# Altium PCB PCB1.PcbDoc
Units mm, origin at the board's own origin, x right, y up, seen from the top; angles counter-clockwise.
Board outline 99.19 x 94.49 mm, 2 copper layers (Top Layer, Bottom Layer); 46 components, 45 nets, 177 pads, 18 vias.
Unrouted connection lines stored in the file: 1.
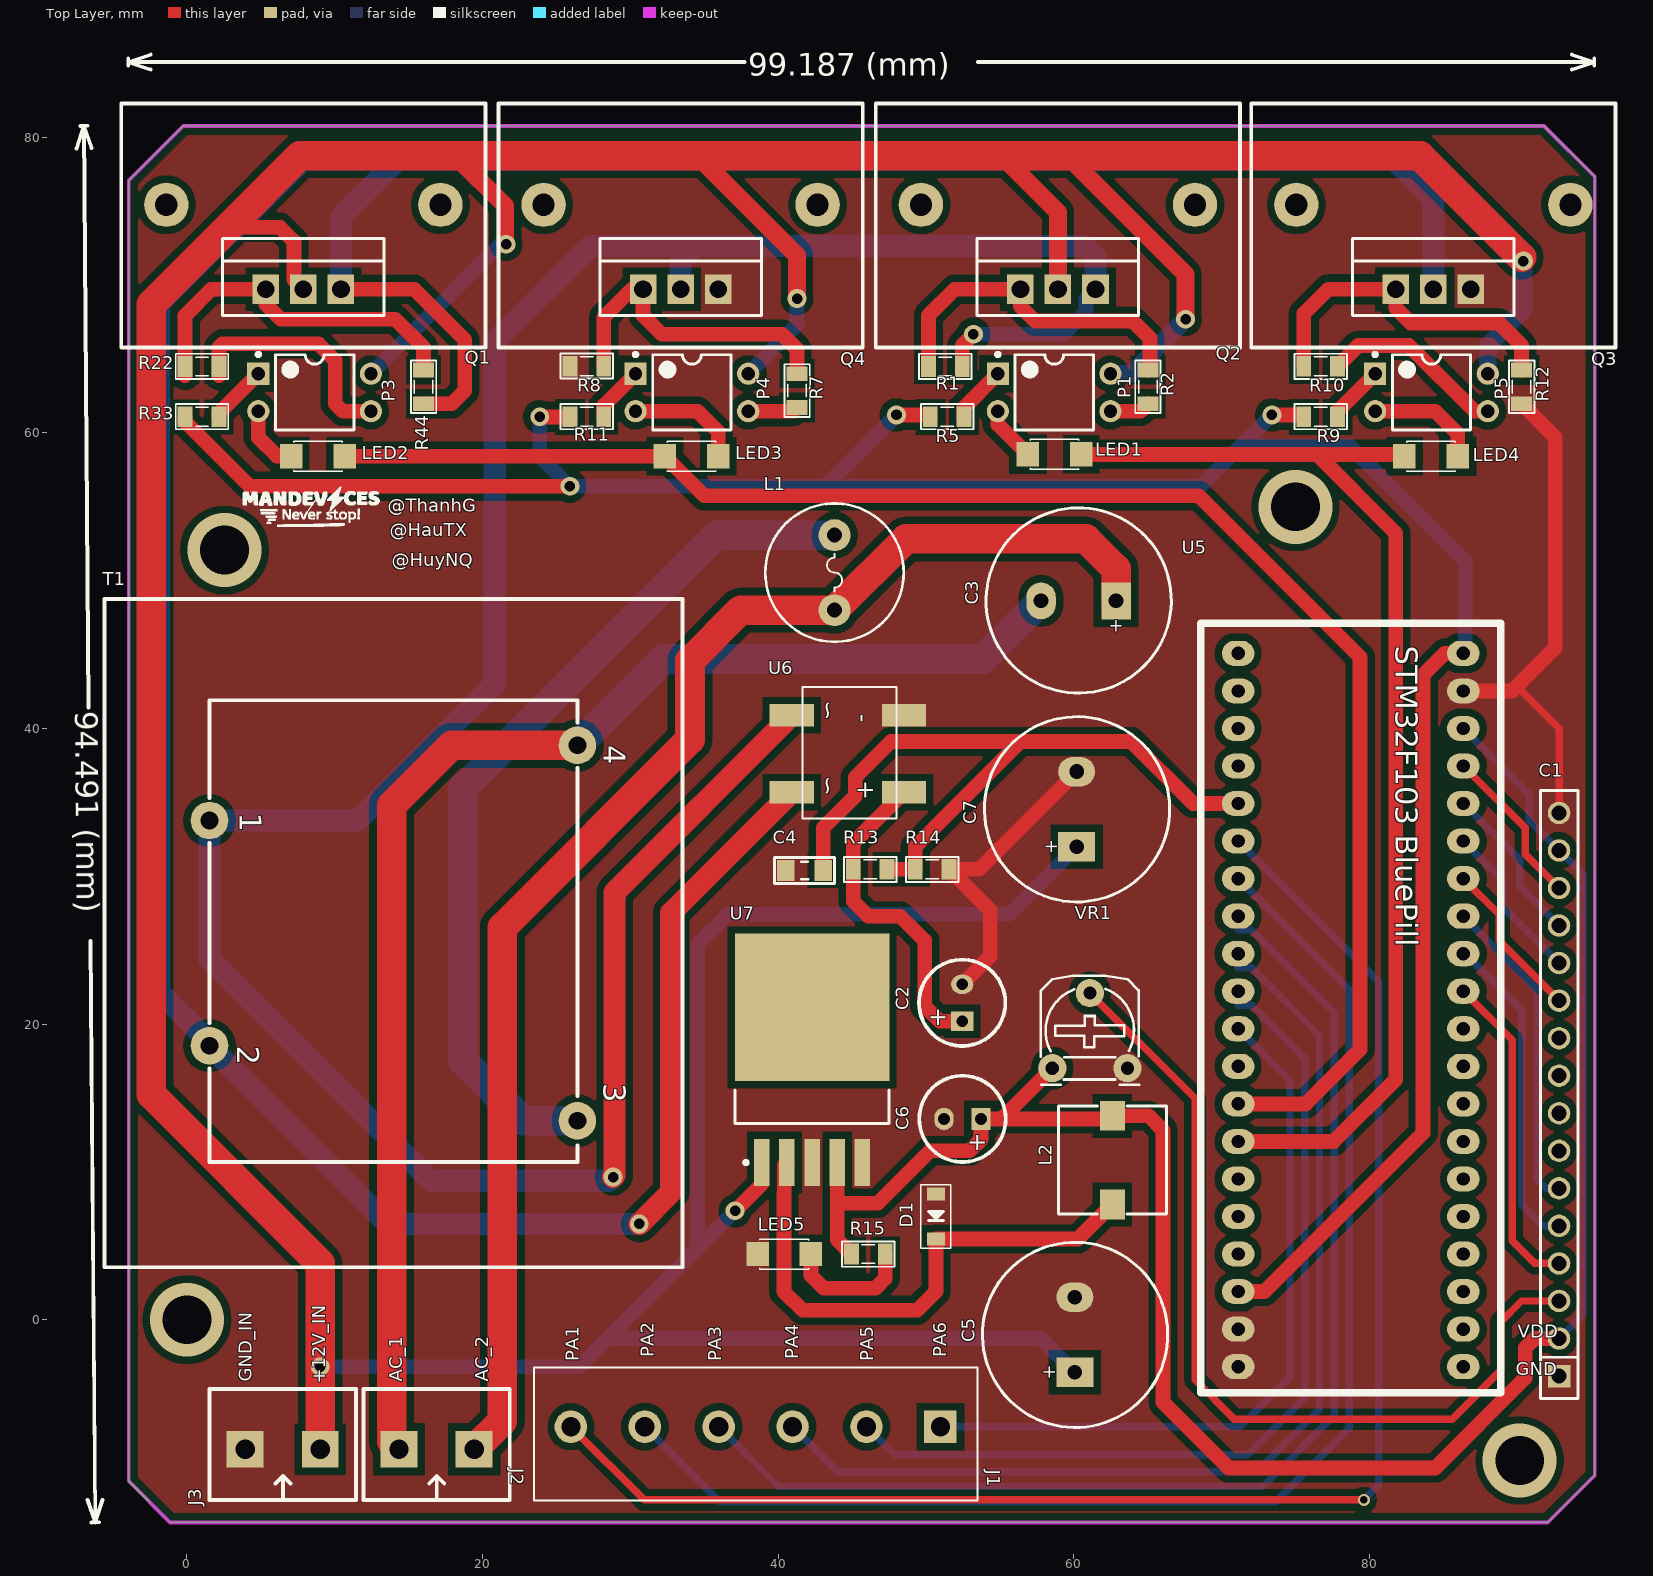
[diagram p0: Top Layer view]
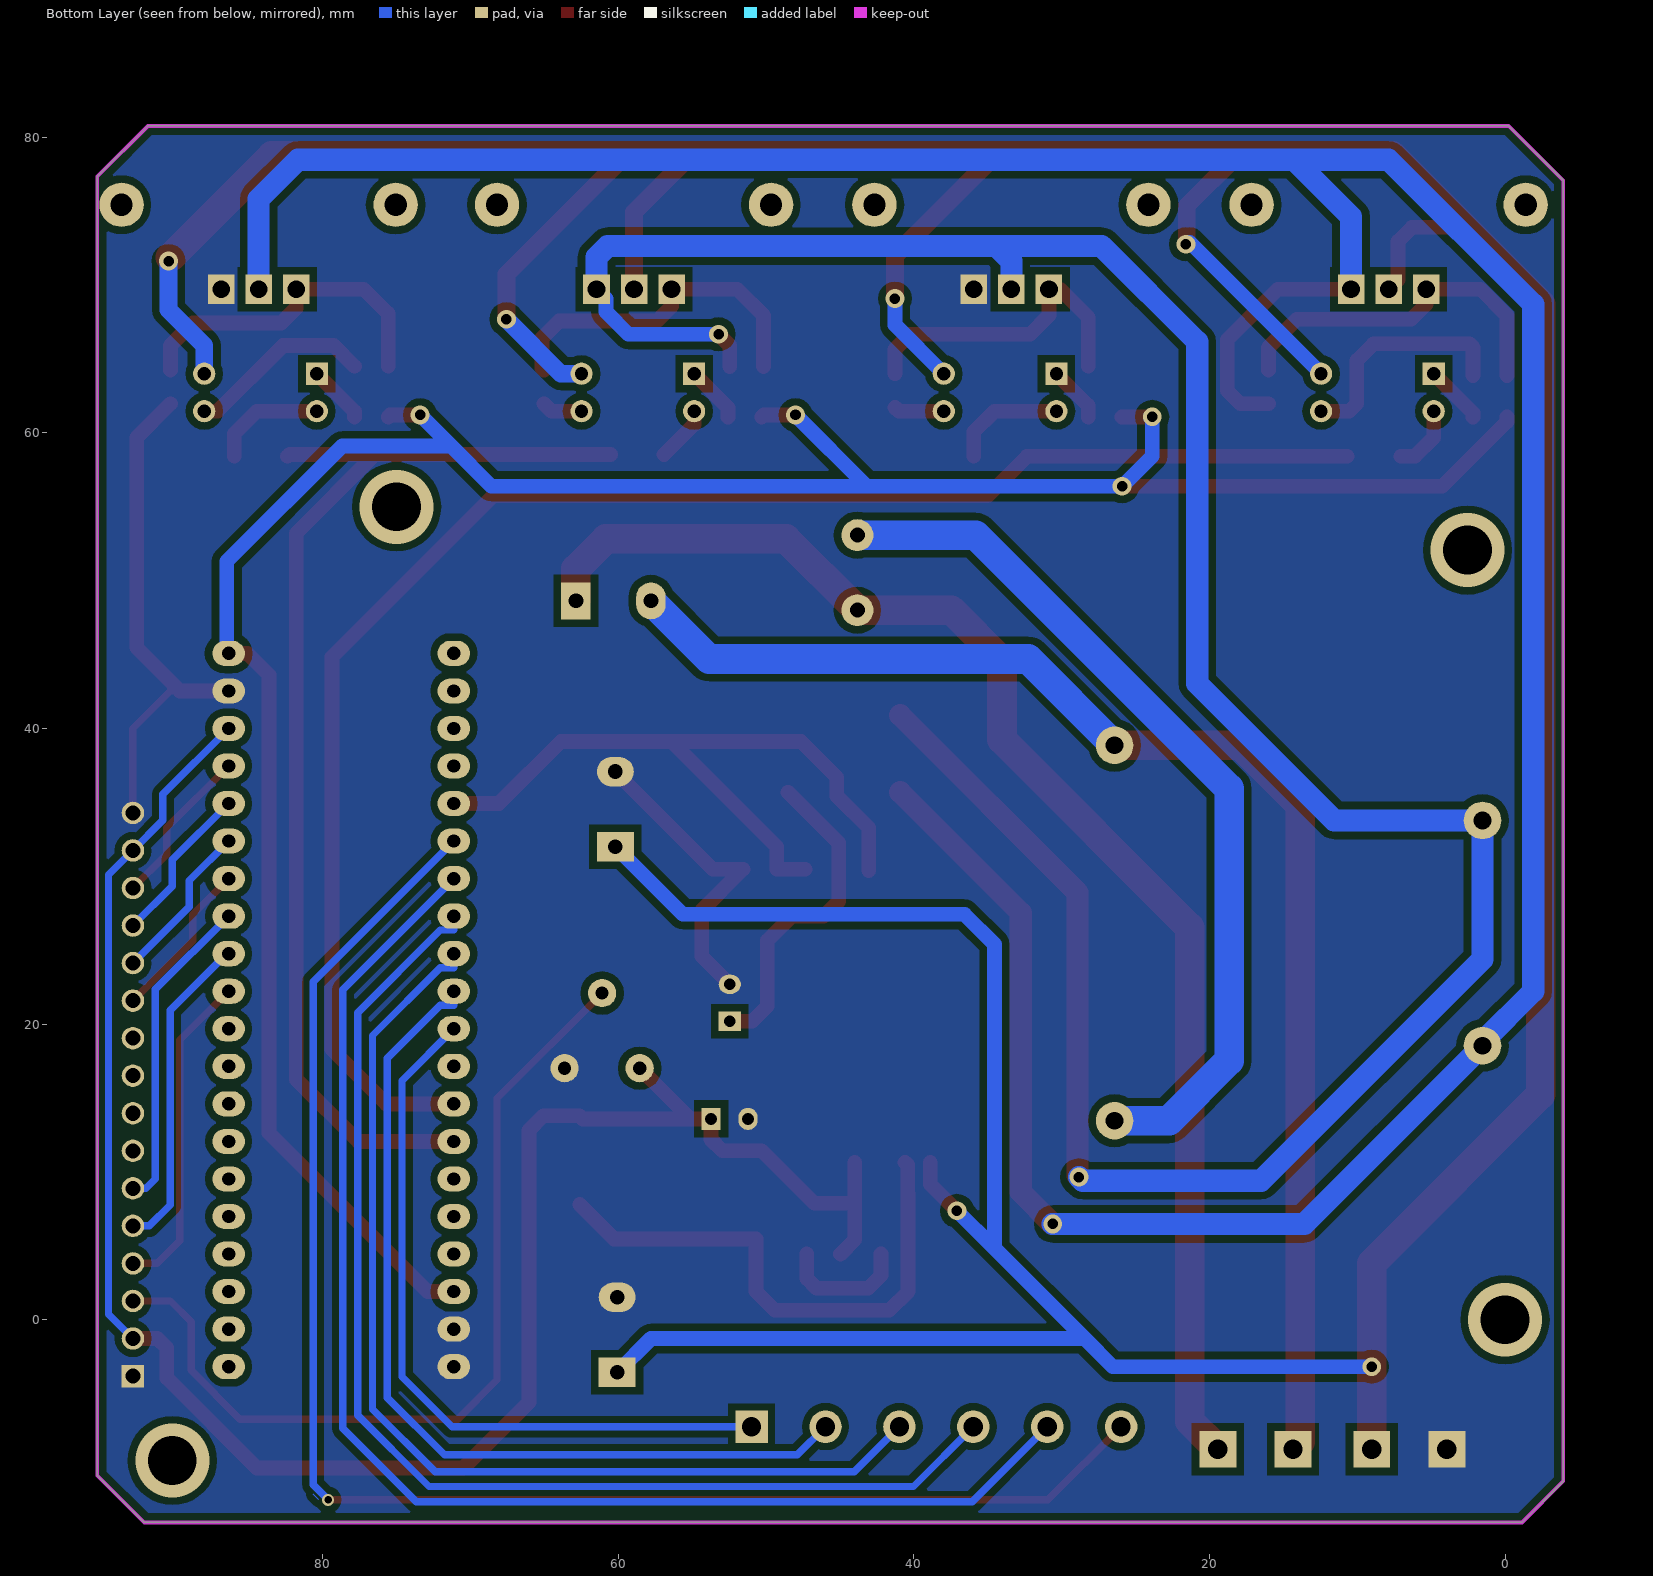
[diagram p1: Bottom Layer view, seen from below]
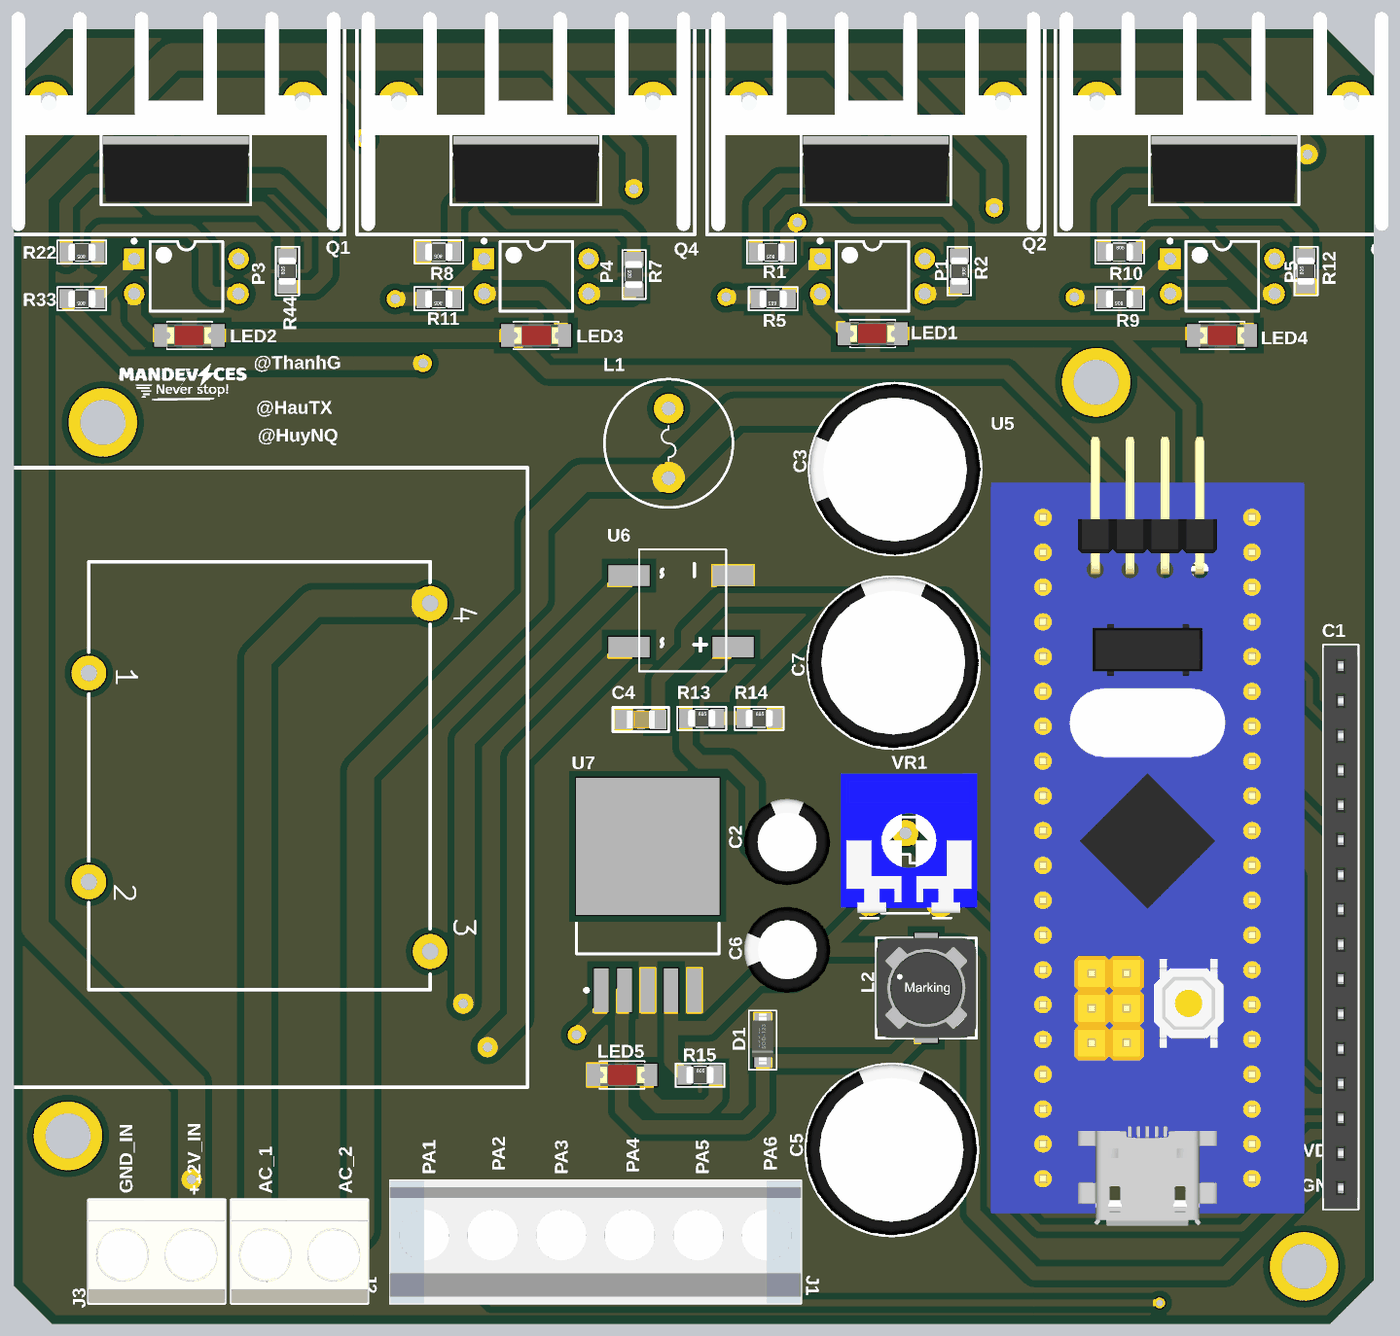
[diagram p2: 3D render of the assembled board from above, using the file's embedded part models]

## Layer stack, top to bottom
Top Solder: solder mask 0.0102, Solder Resist, Dk 3.5
Top Layer: signal copper 0.0356
Dielectric 1: dielectric 0.32, FR-4, Dk 4.8
Bottom Layer: signal copper 0.0356
Bottom Solder: solder mask 0.0102, Solder Resist, Dk 3.5

## Board outline
-1.143,-13.716 -3.937,-10.922 -3.937,77.089 -0.254,80.772 91.821,80.772 95.25,77.343 95.25,-10.541 92.075,-13.716

## Design rules (kind name [scope] priority, off if disabled: settings)
Clearance [All] p1: gap=0.5 ignorepadtopadclearanceinfootprint=FALSE
PolygonConnect [All] p1: connectstyle=Direct reliefconductorwidth=0.254 reliefentries=4 polygonreliefangle="90 Angle" airgapwidth=0.254
RoutingVias [All] p1: holewidth=0.711 width=1.27 viastyle="Through Hole" minholewidth=0.711 minwidth=1.27 maxholewidth=0.711 maxwidth=1.27
SolderMaskExpansion [All] p1: expansion=0.102
Width [All] p1: maxlimit=3 minlimit=0.5 preferedwidth=1
30 further rules are at their usual default settings.

## Components (designator, comment, footprint, x,y, rotation, side; value= is the part's Value field where it differs from the comment)
C1 "JP16" JP16-C1T 92.837,-3.81 r90 top
C2 "220 uF" C8mm 52.451,21.443 r90 top
C3 "Cap Pol" C12mm 60.325,48.641 r180 top
C4 "100nF" CAP_0805 41.783,30.418 r0 top value=33p
C5 "680 uF" C12mm 60.071,-1.016 r90 top
C6 "220 uF" C8mm 52.471,13.589 r180 top
C7 "Cap Pol" C12mm 60.198,34.544 r90 top
D1 "1N5822" DIO-SMD-123 50.673,6.985 r90 top value="Diode c?m 1N5408"
J1 "KF6" KF6-5 38.474,-7.239 r180 top (schematic designator J?)
J2 "KF2" KF2-5.08 16.891,-8.763 r180 top
J3 "KF2" KF2-5.08 6.477,-8.763 r180 top
L1 "150mH" L01 43.815,50.546 r270 top value="150 mH"
L2 "33 uH" L-SMD-M-7.3x4.5 62.611,10.795 r180 top
LED1 "LED" LED-1206-Red 56.896,58.547 r0 top value="LED 3 ly Single Colour"
LED2 "LED" LED-1206-Red 7.061,58.42 r0 top value="LED 3 ly Single Colour"
LED3 "LED" LED-1206-Red 35.941,58.42 r180 top value="LED 3 ly Single Colour"
LED4 "LED" LED-1206-Red 85.979,58.42 r180 top value="LED 3 ly Single Colour"
LED5 "LED" LED-1206-Red 42.215,4.445 r180 top value="LED 3 ly Single Colour"
P1 "PC817" DIP-4 58.674,62.738 r0 top
P3 "PC817" DIP-4 8.636,62.738 r0 top
P4 "PC817" DIP-4 34.163,62.738 r0 top
P5 "PC817" DIP-4 84.201,62.738 r0 top
Q1 "IRFZ44" TO-220-Heatsink 7.874,69.723 r0 top value=IRF840
Q2 "IRFZ44" TO-220-Heatsink 58.928,69.723 r0 top value=IRF840
Q3 "IRFZ44" TO-220-Heatsink 84.328,69.723 r0 top value=IRF840
Q4 "IRFZ44" TO-220-Heatsink 33.401,69.723 r0 top value=IRF840
R1 "10k" RES-SMD-0805 51.308,64.491 r180 top
R2 "470" RES-SMD-0805 65.024,63.119 r270 top
R5 "470" RES-SMD-0805 51.435,61.087 r180 top
R7 "470" RES-SMD-0805 41.275,62.865 r90 top
R8 "10k" RES-SMD-0805 27.051,64.516 r180 top
R9 "470" RES-SMD-0805 76.708,61.087 r180 top
R10 "470" RES-SMD-0805 76.708,64.516 r0 top
R11 "470" RES-SMD-0805 27.051,61.087 r180 top
R12 "10k" RES-SMD-0805 90.297,63.119 r90 top
R13 "10k" RES-SMD-0805 46.228,30.48 r0 top
R14 "1k" RES-SMD-0805 50.419,30.48 r0 top
R15 "470" RES-SMD-0805 46.101,4.445 r0 top
R22 "470" RES-SMD-0805 1.016,64.491 r180 top
R33 "470" RES-SMD-0805 1.016,61.087 r180 top
R44 "10k" RES-SMD-0805 16.002,63.119 r90 top
T1 "Trans" "Transformer 12V-6VA" 1.524,33.782 r270 top
U5 "STM32 BluePill" "STM32 Bluepill" 78.232,18.415 r180 top
U6 "Diode Bridge Flate" DB207S 44.704,38.227 r270 top
U7 "LM2976" TO-263 42.291,16.637 r90 top
VR1 "10K" VR 58.547,17.018 r0 top value="VR 10K"

## Footprints (in the part's own frame and the unit in brackets; to place one, negate y for a bottom-side part, rotate by r counter-clockwise, add the part's x,y. Pads: shape width x height; smd on the part's side, far side on the other; paste and mask are expansions set on the pad)
C8mm [mm]
  rect 1.3x1.5 hole 0.8: 1(-1.25,0)
  oval 1.3x1.5 hole 0.8: 2(1.25,0)
  silkscreen extent -2.92,-2.92 2.92,2.92, body extent -3.15,-3.15 3.16,3.15, height 11.51
C12mm [mm]
  rect 2x2.5 hole 1: 1(-2.54,0)
  oval 2x2.5 hole 1: 2(2.54,0)
  silkscreen extent -6.27,-6.29 6.26,6.24, body extent -6.25,-6.25 6.21,6.25, height 2.2
CAP_0805 [mm]
  rect 1.2x1.4 smd: 1(-1.27,-0.025) 2(1.27,-0.025)
  silkscreen extent -2.03,-0.91 2.03,0.86, body extent -1.01,-0.66 1.01,0.61, height 0.61
DB207S [mm] "Bridge Rectifiers 2A 1000V"
  rect 1.5x3 smd: 1(2.54,3.81) 2(2.54,-3.785) 3(-2.667,-3.785) 4(-2.667,3.81)
  silkscreen extent -4.57,-3.05 4.32,3.3
DIO-SMD-123 [mm]
  rect 0.9x1.2 smd: 1(1.524,0) 2(-1.524,0)
  silkscreen extent -2.16,-1.02 2.16,1.02, body extent -1.76,-0.8 1.94,0.8, height 1.25
DIP-4 [mm] "DIP; 4 Leads; Row Spacing 7.62 mm; Pitch 2.54 mm"
  rect 1.5x1.5 hole 0.9: 1(-3.81,1.27)
  round 1.5 hole 0.9: 2(-3.81,-1.27) 3(3.81,-1.27) 4(3.81,1.27)
  silkscreen extent -3.93,-2.55 2.65,2.69, body extent -3.15,-2.5 3.15,2.5, height 5.6
JP16-C1T [mm] "16 row, straight, gold plating"
  rect 1.52x1.52 hole 1.02: 1(0,0)
  round 1.52 hole 1.02: 2(2.54,0) 3(5.08,0) 4(7.62,0) 5(10.16,0) 6(12.7,0) 7(15.24,0) 8(17.78,0) 9(20.32,0) 10(22.86,0) 11(25.4,0) 12(27.94,0) 13(30.48,0) 14(33.02,0) 15(35.56,0) 16(38.1,0)
  silkscreen extent -1.52,-1.27 39.62,1.27, body extent -1.52,-1.25 39.62,1.25, height 8.51
KF2-5.08 [mm]
  rect 2.5x2.5 hole 1.3: 1(-2.54,0) 2(2.54,0)
  silkscreen extent -4.95,-4.08 4.95,3.43, body extent -5,-4.07 5,3.43, height 10
KF6-5 [mm] "Serie 1337 - 5.00 mm_6 pins"
  rect 2.2x2.2 hole 1.3: 1(-12.5,0)
  round 2.2 hole 1.3: 2(-7.5,0) 3(-2.5,0) 4(2.5,0) 5(7.5,0) 6(12.5,0)
  silkscreen extent -15,-4 15,5, body extent -15,-4 15,5, height 13
L01 [mil] "Inductor"
  round 85 hole 40: 1(-100,0) 2(100,0)
  silkscreen extent -184,-184 184,184
L-SMD-M-7.3x4.5 [mm] "WE-PDA SMD Shielded Power Inductor, 7345"
  rect 1.7x2 smd: 1(0,3) 2(0,-3)
  silkscreen extent -3.65,-3.65 3.65,3.65, body extent -3.65,-3.65 3.65,3.65, height 4.05
LED-1206-Red [mil]
  rect 60x65 smd: 1(0,0) 2(142,0)
  silkscreen extent 6,-40 136,40, body extent 7,-31 133,31, height 43
RES-SMD-0805 [mil]
  rect 39.37x55 smd: 1(-45,0) 2(45,0)
  silkscreen extent -70,-34 70,33, body extent -39,-25 39,25, height 31
"STM32 Bluepill" [mm] "STM32 Bluepill"
  oval 2.2x1.7 hole 0.9: 1(-8.128,21.59) 2(-8.128,19.05) 3(-8.128,16.51) 4(-8.128,13.97) 5(-8.128,11.43) 6(-8.128,8.89) 7(-8.128,6.35) 8(-8.128,3.81) 9(-8.128,1.27) 10(-8.128,-1.27) 11(-8.128,-3.81) 12(-8.128,-6.35) 13(-8.128,-8.89) 14(-8.128,-11.43) 15(-8.128,-13.97) 16(-8.128,-16.51) 17(-8.128,-19.05) 18(-8.128,-21.59) 19(-8.128,-24.13) 20(-8.128,-26.67) 21(7.112,-26.67) 22(7.112,-24.13) 23(7.112,-21.59) 24(7.112,-19.05) 25(7.112,-16.51) 26(7.112,-13.97) 27(7.112,-11.43) 28(7.112,-8.89) 29(7.112,-6.35) 30(7.112,-3.81) 31(7.112,-1.27) 32(7.112,1.27) 33(7.112,3.81) 34(7.112,6.35) 35(7.112,8.89) 36(7.112,11.43) 37(7.112,13.97) 38(7.112,16.51) 39(7.112,19.05) 40(7.112,21.59)
  silkscreen extent -10.67,-28.7 9.65,23.37, body extent -11.94,-32.59 10.92,24.97, height 19.77
TO-220-Heatsink [mm] "TO, Thru-Hole, Vertical, Heatsink Mounted; 15 Bent Staggered Leads; Pitch 1.27 mm"
  round 3 hole 1.5: 0(-9.271,5.715) 0(9.271,5.715)
  rect 1.8x2 hole 1.2: 1(-2.54,0) 2(0,0) 3(2.54,0)
  silkscreen extent -12.32,-3.94 12.32,12.57, body extent -12,-3.68 12,12.32, height 25.01
TO-263 [mm]
  rect 3.2x1.05 smd: 1(-6,3.4) 2(-6,1.7) 3(-6,0) 4(-6,-1.7) 5(-6,-3.4)
  rect 10x10.45 smd: 6(4.5,0)
  silkscreen extent -6.12,-5.2 -1.1,5.2, body extent -6.58,-5.2 7.57,5.2, height 4.65
"Transformer 12V-6VA" [mm] "Transformer; 4 Leads"
  round 2.54 hole 1.2: 1(0,0) 2(15.24,0) 3(20.32,24.892) 4(-5.08,24.892)
  silkscreen extent -14.99,-7.11 30.23,32, body extent -14.99,-7.11 30.23,32, height 31
VR [mil] "Resistor Variable"
  round 75 hole 35: 1(0,0) 2(100,200) 3(200,0)
  silkscreen extent -31,-44 231,246, body extent -87,-30 307,372, height 165

## Part data
C1: "WR-PHD 2.54 mm Angled Socket Header", Manufacturer="W¨¹rth Elektronik eiSos GmbH", partNo=613016143121, ComponentLink1 Description=Manufacturer, ComponentLink1URL=http://www.we-online.com, ComponentLink2 Description=Datasheet, ComponentLink2URL=http://katalog.we-online.de/em/datasheet/6130xx143121.pdf, Created by="Karrer Zheng", Created Date="29 March 2013", NoPins=16
C2 C5 C6: library part "Cap Pol", "Polarized Capacitor (Axial)", LatestRevisionDate=17-Jul-2002, LatestRevisionNote="Re-released for DXP Platform.", PackageReference=POLAR0.8, Published=8-Jun-2000, Publisher="Altium Limited"
C3 C7: "Polarized Capacitor (Axial)", LatestRevisionDate=17-Jul-2002, LatestRevisionNote="Re-released for DXP Platform.", PackageReference=POLAR0.8, Published=8-Jun-2000, Publisher="Altium Limited"
C4: library part CapSMD, "Capacitor", LatestRevisionDate=17-Jul-2002, LatestRevisionNote="Re-released for DXP Platform.", PackageReference=RAD-0.3, Published=8-Jun-2000, Publisher="Altium Limited"
D1: "Schottky Rectifiers"
J1: Manufacturer="W¨¹rth Elektronik eiSos GmbH", partNo=691133710006, ComponentLink1 Description=Manufacturer, ComponentLink1 URL=http://www.we-online.com, ComponentLink2 Description=Datasheet, ComponentLink2 URL=http://katalog.we-online.de/em/datasheet/6911337100xx.pdf, Created by="Baojun Chen", Created Date=4-Aug-15, NoPins=6
J2 J3: Manufacturer="Würth Elektronik eiSos GmbH", partNo=691103110002, ComponentLink1 Description=Manufacturer, ComponentLink1URL=http://www.we-online.com, ComponentLink2 Description=Datasheet, ComponentLink2URL=http://katalog.we-online.de/em/datasheet/6911031100xx.pdf, Created by="Karrer Zheng", Created Date="29 October 2013", NoPins=2
L1: library part L1, "Inductor"
L2: library part L-SMD-1, Inductance="1.0 µH", Manufacturer="Wurth Elektronik", partNo=78477010, ComponentLink1Description=Manufacturer, ComponentLink1URL=http://www.we-online.de, ComponentLink2Description=Datasheet, ComponentLink2URL=http://katalog.we-online.de/pbs/datasheet/78477010.pdf, Created by="Baojun Chen", Created Date=Nov.2015
LED1 LED2 LED3 LED4 LED5: "LED Single colour Green and Red"
P1 P3 P4 P5: "NPN PHOTO General Purpose Amplifier", Code_JEDEC=TO-92A, DatasheetDocument=1997, LatestRevisionDate=15-Jan-2003, LatestRevisionNote="PCB Footprint 'BCY-W3/D4.7' replaced", PackageReference=TO-92A, Published=8-Jun-2000, Publisher="Altium Limited"
R1 R2 R5 R7 R8 R9 R10 R11 R12 R13 R14 R15 R22 R33 R44: library part "Resistor - SMD", "Resistor", Manufacturer="Generic Components", Class=Passive, Published=08/06/2000, Publisher="Altium Hobart Technology Centre"
T1: "Transformer (12V-6VA)", LatestRevisionDate=17-Jul-2002, LatestRevisionNote="Re-released for DXP Platform.", PackageDescription="Transformer; 4 Leads", PackageReference=TRF_4, Published=8-Jun-2000, Publisher="Altium Limited"
U5: "STM32F103C8T6 breakout board"
U6: "Diode Bridge"
U7: library part LM2596, Max Input Voltage="12 V", Max Output Current="3 (6.0 peak) A", Max Output Voltage=mV, Temperature Range="-40 to +125 degC", Category=IC-Power, Min Input Voltage=mV, Min Output Voltage=mV, Mounting Technology="Surface Mount", Status=Unreleased, Supply Voltage=mV
VR1: library part VR, "Var Resistor"

## Via types
v1: diameter 1.27, hole 0.711, Top Layer to Bottom Layer, 13 vias
v2: diameter 5, hole 3.3, Top Layer to Bottom Layer, 4 vias
v3: diameter 0.8, hole 0.5, Top Layer to Bottom Layer, 1 vias

## Nets (pads, with @x,y where several pads share a name; then routed paths per layer and width w, separated by ;. In a path a pad name is that pad's centre, name@x,y a point inside that pad or via, vN(x,y) a via of type N, cw(c..) or ccw(c..) an arc to the next point about the centre after c; other vN are vias at no path point)
3.3V: R5.2 R9.2 R11.2 R33.2 U5.20 U5.38 | length 172.7
  Top Layer w1: R33.2 -0.127,60.76 4.245,56.388 v1(25.908,56.388) ; v1(23.876,61.087) R11.2 ; v1(48.006,61.214) 50.165,61.214 R5.2 ; U5.38 72.898,1.905 83.636,12.643 83.636,43.631 85.09,45.085 U5.20 ; v1(73.406,61.214) 75.438,61.214 R9.2
  Bottom Layer w1: v1@24.003,61.087 v1(23.876,61.087) 23.876,58.42 v1(25.908,56.388) 43.18,56.388 ; v1(48.006,61.214) 43.18,56.388 ; v1(73.406,61.214) 71.31,59.118 ; U5.20@86.487,45.085 86.487,51.308 78.676,59.118 71.31,59.118 ; 43.18,56.388 68.58,56.388 71.31,59.118
5V: C1.2 C1.15 C6.1 L2.2 R15.1 U5.18 U7.4 VR1.1 | length 134.4
  Top Layer w1: U7.4 43.991,7.874 ; R15.1 43.991,5.412 43.991,7.874 ; VR1.1 55.118,13.589 ; C1.2 91.186,-1.27 90.551,-1.905 90.551,-3.937 84.455,-10.033 70.485,-10.033 66.04,-5.588 66.04,12.827 65.072,13.795 L2.2 62.405,13.589 55.118,13.589 ; 43.991,7.874 46.736,7.874 50.292,11.43 52.959,11.43 53.721,12.192 C6.1 55.118,13.589
  Bottom Layer w0.5: U5.18 90.805,35.56 90.805,33.782 C1.15 94.488,30.099 94.488,0.381 C1.2
12V: C5.1 C7.1 J3.1 P1.4 P3.4 P4.4 P5.4 Q1.2 Q2.2 U7.1 | length 387.6
  Top Layer w1: 2.794,73.914 6.29,73.914 7.234,72.97 7.234,70.363 Q1.2 ; v1(37.084,7.366) 38.891,9.173 U7.1
  Top Layer w1.2: 18.161,78.74 21.53,75.371 21.53,72.831 v1(21.59,72.771) ; 34.544,78.74 41.275,72.009 v1(41.275,69.088) ; 55.118,78.74 58.928,74.93 Q2.2 ; 59.563,78.74 67.564,70.739 v1(67.564,67.691)
  Top Layer w2: J3.1 v1(9.017,-3.175) 9.017,3.81 -2.413,15.24 -2.413,68.707 2.794,73.914 7.62,78.74 18.161,78.74 34.544,78.74 55.118,78.74 59.563,78.74 83.439,78.74 v1@90.297,71.882
  Bottom Layer w1: v1(9.017,-3.175) 26.543,-3.175 28.448,-1.27 ; P3.4 21.336,72.898 21.463,72.771 v1(21.59,72.771) ; v1(37.084,7.366) 34.544,4.826 ; P4.4 41.275,67.31 v1(41.275,69.088) ; C5.1 57.785,-1.27 28.448,-1.27 ; C7.1 55.626,27.432 36.576,27.432 34.544,25.4 34.544,4.826 ; 28.448,-1.27 34.544,4.826
  Bottom Layer w1.2: P1.4 63.881,64.008 v1(67.564,67.691) ; P5.4 88.011,65.913 90.424,68.326 v1(90.424,71.628)
ADC_FB: C4.2 R13.2 R14.1 U5.25 | length 49.3
  Top Layer w1: C4.2 43.053,33.274 45.212,35.433 45.212,36.703 47.625,39.116 56.388,39.116 ; R13.2 R14.1 49.276,32.004 56.388,39.116 ; U5.25 68.072,34.925 63.881,39.116 56.388,39.116
BA1: Q1.3 Q3.2 R44.1 T1.2 U6.2 | length 243.4
  Top Layer w1: Q1.3 15.367,69.723 18.796,66.294 18.796,62.865 17.907,61.976 R44.1
  Top Layer w1.5: v1(30.607,6.477) 32.766,8.636 32.766,27.534 U6.2
  Bottom Layer w1.5: Q1.3 10.414,74.628 14.272,78.486 ; v1(30.607,6.477) 13.589,6.477 T1.2 1.524,18.796 -1.905,22.225 -1.905,68.707 7.874,78.486 14.272,78.486 ; Q3.2 84.328,75.819 81.661,78.486 14.272,78.486
BA2: Q2.3 Q4.2 R1.1 T1.1 U6.3 | length 187.2
  Top Layer w1: R1.1 52.451,65.913 v1(53.213,66.675)
  Top Layer w1.5: v1(28.829,9.652) 28.936,9.759 28.936,28.911 U6.3
  Bottom Layer w1: v1(53.213,66.675) 59.309,66.675 60.828,68.194 60.828,69.083 Q2.3
  Bottom Layer w1.5: v1(28.829,9.652) 28.575,9.398 16.51,9.398 1.524,24.384 T1.1 11.557,33.782 20.828,43.053 20.828,66.167 27.305,72.644 34.417,72.644 ; Q4.2 33.401,71.628 34.417,72.644 ; Q2.3 61.468,71.882 60.706,72.644 34.417,72.644
D4_LCD: C1.11 U5.14 | length 10.9
  Top Layer w0.5: U5.14 88.789,27.416 88.789,25.638 C1.11
D5_LCD: C1.12 U5.15 | length 10.9
  Bottom Layer w0.5: U5.15 89.027,29.718 89.027,27.94 C1.12
D6_LCD: C1.13 U5.16 | length 10.9
  Bottom Layer w0.5: U5.16 90.17,31.115 90.17,29.337 C1.13
D7_LCD: C1.14 U5.17 | length 10.9
  Top Layer w0.5: U5.17 90.551,33.274 90.551,31.496 C1.14
EN_LCD: C1.6 U5.13 | length 21.6
  Bottom Layer w0.5: U5.13 91.313,22.352 91.313,9.525 91.948,8.89 C1.6
G2: Q2.1 R1.2 R2.1 | length 23.4
  Top Layer w1: R1.2 50.165,67.945 51.943,69.723 Q2.1 56.388,68.58 57.404,67.564 64.008,67.564 65.151,66.421 65.151,64.389 R2.1
G3: Q4.1 R7.2 R8.1 | length 21.5
  Top Layer w1: R8.1 28.194,67.818 30.099,69.723 Q4.1 30.861,67.945 32.131,66.675 40.259,66.675 41.275,65.659 R7.2
GND: C1.1 C1.16 C2.2 C4.1 C5.2 C6.2 C7.2 D1.1 J3.2 LED5.2 Q3.3 Q4.3 R8.2 R12.1 R14.2 U5.19 U5.39 U5.40 U6.4 U7.3 U7.5 VR1.3 | length 55.9
  Top Layer w0.5: 89.662,42.545 90.297,42.545 92.837,40.005 C1.16
  Top Layer w1: C2.2 54.356,24.598 54.356,27.686 R14.2 53.594,30.48 C7.2 ; U5.19 89.662,42.545 92.583,45.466 92.583,59.69 R12.1
NetC1_3: C1.3 VR1.2 | length 59.8
  Top Layer w0.5: VR1.2 68.199,14.986 68.199,-4.064 70.866,-6.731 85.598,-6.731 88.9,-3.429 88.9,-0.127 90.297,1.27 C1.3@92.583,1.27
NetC2_1: C2.1 R13.1 U6.1 | length 22.1
  Top Layer w1: U6.1 45.085,32.258 R13.1 45.085,28.321 46.101,27.305 48.26,27.305 49.911,25.654 49.911,21.209 50.927,20.193 C2.1
NetC3_1: C3.1 J2.1 L1.2 | length 94.6
  Top Layer w2: J2.1 21.336,-6.858 21.336,26.543 34.036,39.243 34.036,44.577 37.465,48.006 L1.2 48.641,52.832 60.833,52.832 62.865,50.8 C3.1
NetC3_2: C3.2 J2.2 T1.4 | length 93.4
  Top Layer w2: J2.2 13.843,-8.255 13.843,34.798 17.907,38.862 T1.4
  Bottom Layer w2: T1.4 32.258,44.704 53.848,44.704 C3.2
NetD1_2: D1.2 L2.1 U7.2 | length 36.6
  Top Layer w1: U7.2 40.416,10.462 40.416,8.577 40.386,8.547 40.386,1.905 41.656,0.635 49.403,0.635 50.673,1.905 D1.2 60.277,5.461 L2.1
NetJ1_1: J1.1 U5.31 | length 50.1
  Bottom Layer w0.5: J1.1 71.247,-7.239 74.629,-3.857 74.629,16.176 U5.31
NetJ1_2: J1.2 U5.30 | length 61.9
  Bottom Layer w0.5: J1.2 47.879,-9.144 71.755,-9.144 75.629,-5.27 75.629,17.689 72.033,21.285 71.12,21.285 U5.30
NetJ1_3: J1.3 U5.29 | length 72.3
  Bottom Layer w0.5: J1.3 44.022,-10.287 72.39,-10.287 76.629,-6.048 76.629,19.229 72.033,23.825 71.12,23.825 U5.29
NetJ1_4: J1.4 U5.28 | length 82.3
  Bottom Layer w0.5: J1.4 40.022,-11.287 72.804,-11.287 72.907,-11.185 77.629,-6.462 77.629,20.769 72.033,26.365 71.12,26.365 U5.28
NetJ1_5: J1.5 U5.27 | length 92.1
  Bottom Layer w0.5: J1.5 36.054,-12.319 73.66,-12.319 78.629,-7.35 78.629,22.336 U5.27
NetJ1_6: J1.6 U5.26 | length 105.2
  Top Layer w0.5: J1.6 30.927,-12.192 v3(79.629,-12.192)
  Bottom Layer w0: 80.264,-12.192 80.645,-11.811
  Bottom Layer w0.5: U5.26 80.645,22.86 80.645,-11.176 v3(79.629,-12.192)
NetL1_1: L1.1 T1.3 | length 60.1
  Bottom Layer w2: T1.3 22.733,13.462 18.669,17.526 18.669,35.941 35.814,53.086 L1.1
NetLED1_1: LED1.1 P1.2 | length 3.8
  Top Layer w1: P1.2 54.864,60.579 LED1.1
NetLED2_1: LED2.1 P3.2 | length 4.5
  Top Layer w1: P3.2 4.826,59.69 6.096,58.42 LED2.1
NetLED3_1: LED3.1 P4.2 | length 7.8
  Top Layer w1: P4.2 34.544,61.468 35.941,60.071 LED3.1
NetLED4_1: LED4.1 P5.2 | length 7.7
  Top Layer w1: P5.2 84.455,61.468 85.979,59.944 LED4.1
NetLED5_1: LED5.1 R15.2 | length 8.8
  Top Layer w1: LED5.1 42.215,2.997 43.077,2.135 46.585,2.135 47.244,2.794 R15.2
NetP1_1: P1.1 R5.1 | length 3.9
  Top Layer w1: R5.1 52.578,61.722 P1.1
NetP1_3: P1.3 R2.2 | length 2.8
  Top Layer w1: P1.3 64.516,61.468 R2.2
NetP3_1: P3.1 R33.1 | length 4
  Top Layer w1: R33.1 2.159,61.341 P3.1
NetP3_3: P3.3 R22.1 | length 15.9
  Top Layer w1: R22.1@2.159,63.881 2.159,65.786 2.413,66.04 8.89,66.04 10.033,64.897 10.033,61.976 10.541,61.468 P3.3
NetP4_1: P4.1 R11.1 | length 3.8
  Top Layer w1: R11.1 28.194,61.849 P4.1
NetP4_3: P4.3 R7.1 | length 3.4
  Top Layer w1: P4.3 41.021,61.468 R7.1
NetP5_1: P5.1 R9.1 | length 4
  Top Layer w1: R9.1 77.851,61.468 P5.1
NetP5_3: P5.3 R10.2 | length 12.6
  Top Layer w1: R10.2 79.248,65.913 82.677,65.913 87.122,61.468 P5.3
NetQ1_1: Q1.1 R22.2 R44.2 | length 24.7
  Top Layer w1: R22.2@-0.127,63.881 R22.2 -0.127,67.945 1.651,69.723 Q1.1 5.334,68.707 6.35,67.691 14.097,67.691 16.002,65.786 R44.2
NetQ3_1: Q3.1 R10.1 R12.2 | length 22.9
  Top Layer w1: R10.1 75.565,68.072 77.216,69.723 Q3.1 81.788,68.453 82.804,67.437 88.773,67.437 90.297,65.913 R12.2
PWM1: LED2.2 LED3.2 U5.33 | length 110.7
  Top Layer w1: LED2.2 LED3.2 35.001,55.753 68.453,55.753 79.375,44.831 79.375,18.288 75.692,14.605 U5.33
PWM2: LED1.2 LED4.2 U5.34 | length 78.8
  Top Layer w1: LED1.2 76.454,58.547 ; U5.34 77.597,12.065 81.788,16.256 81.788,53.213 76.454,58.547 ; LED4.2 82.245,58.547 76.454,58.547
RS_LCD: C1.4 U5.11 | length 22.1
  Top Layer w0.5: U5.11 89.662,18.923 89.662,5.334 91.186,3.81 C1.4
RW_LCD: C1.5 U5.12 | length 21.8
  Bottom Layer w0.5: U5.12 86.487,24.765 90.313,20.939 90.313,7.763 91.726,6.35 C1.5
pads on no net: C1.7 C1.8 C1.9 C1.10 Q1.0 Q2.0 Q3.0 Q4.0 U5.1 U5.2 U5.3 U5.4 U5.5 U5.6 U5.7 U5.8 U5.9 U5.10 U5.21 U5.22 U5.23 U5.24 U5.32 U5.35 U5.36 U5.37 U7.6
copper on no net:
  other v2: 90.17,-9.525 0,0 2.54,52.07 75,55

## Polygon pours and split planes (outlines as drawn)
GND on Bottom Layer "Bottom Layer-GND" (solid, pour order 0): -3.937,77.089 -0.254,80.772 91.821,80.772 95.25,77.343 95.25,-10.541 92.075,-13.716 -1.143,-13.716 -3.937,-10.922
GND on Top Layer "Top Layer-GND" (solid, pour order 2): -3.937,-10.922 -1.143,-13.716 92.075,-13.716 95.25,-10.541 95.25,77.343 91.821,80.772 -0.254,80.772 -3.937,77.089

## Keep-outs
Keep-Out Layer:
  the board outline again, w0.254

## Silkscreen, mask and mechanical layers (free items; w line width, h text height)
Top Overlay:
  drawing of 923 lines, arcs and shapes, not listed
  text "99.187 (mm)" at 37.973,84.176 h1.52
  text "@ThanhG" at 13.589,54.356 h1.52
  text "@HauTX" at 13.716,52.705 h1.52
  text "@HuyNQ" at 13.843,50.673 h1.52
  text "94.491 (mm)" at -7.567,41.168 h1.52 r270.46
  text "VDD" at 90.043,-1.524 h1.52
  text "PA2" at 31.877,-2.54 h1.52 r90
  text "PA6" at 51.689,-2.54 h1.52 r90
  text "PA4" at 41.656,-2.667 h1.52 r90
  text "PA1" at 26.797,-2.794 h1.52 r90
  text "PA3" at 36.449,-2.794 h1.52 r90
  text "PA5" at 46.736,-2.794 h1.52 r90
  text "GND" at 89.916,-4.064 h1.52
  text "GND_IN" at 4.699,-4.191 h1.52 r90
  text "AC_1" at 14.859,-4.191 h1.52 r90
  text "AC_2" at 20.701,-4.191 h1.52 r90
  text "+12V_IN" at 9.652,-4.318 h1.52 r90

## Text inside footprints (layer, text, board x,y; h text height)
C2: Top Overlay "+" at 51.333,19.741 h1.2 r90
C3: Top Overlay "+" at 63.373,47.625 h1.52 r180
C5: Top Overlay "+" at 59.055,-4.064 h1.52 r90
C6: Top Overlay "+" at 54.173,12.471 h1.2 r180
C7: Top Overlay "+" at 59.182,31.496 h1.52 r90
T1: Top Overlay "3" at 28.194,16.002 h1.5 r270; Top Overlay "4" at 28.194,38.862 h1.5 r270; Top Overlay "2" at 3.406,18.542 h1.5 r270; Top Overlay "1" at 3.556,34.29 h1.5 r270
U5: Top Overlay "STM32F103 BluePill" at 81.788,45.593 h1.5 r270
U6: Top Overlay "+" at 45.212,36.322 h1.2 r180; Top Overlay "-" at 45.212,40.386 h1.2 r270; Top Overlay "~" at 42.799,35.433 h1.2 r270; Top Overlay "~" at 42.799,40.513 h1.2 r270